# Altium PCB MPP.PcbDoc
Units mil, origin at the board's own origin, x right, y up, seen from the top; angles counter-clockwise.
Board outline 1830 x 1835 mil, 2 copper layers (Top Layer, Bottom Layer); 31 components, 16 nets, 79 pads, 22 vias.
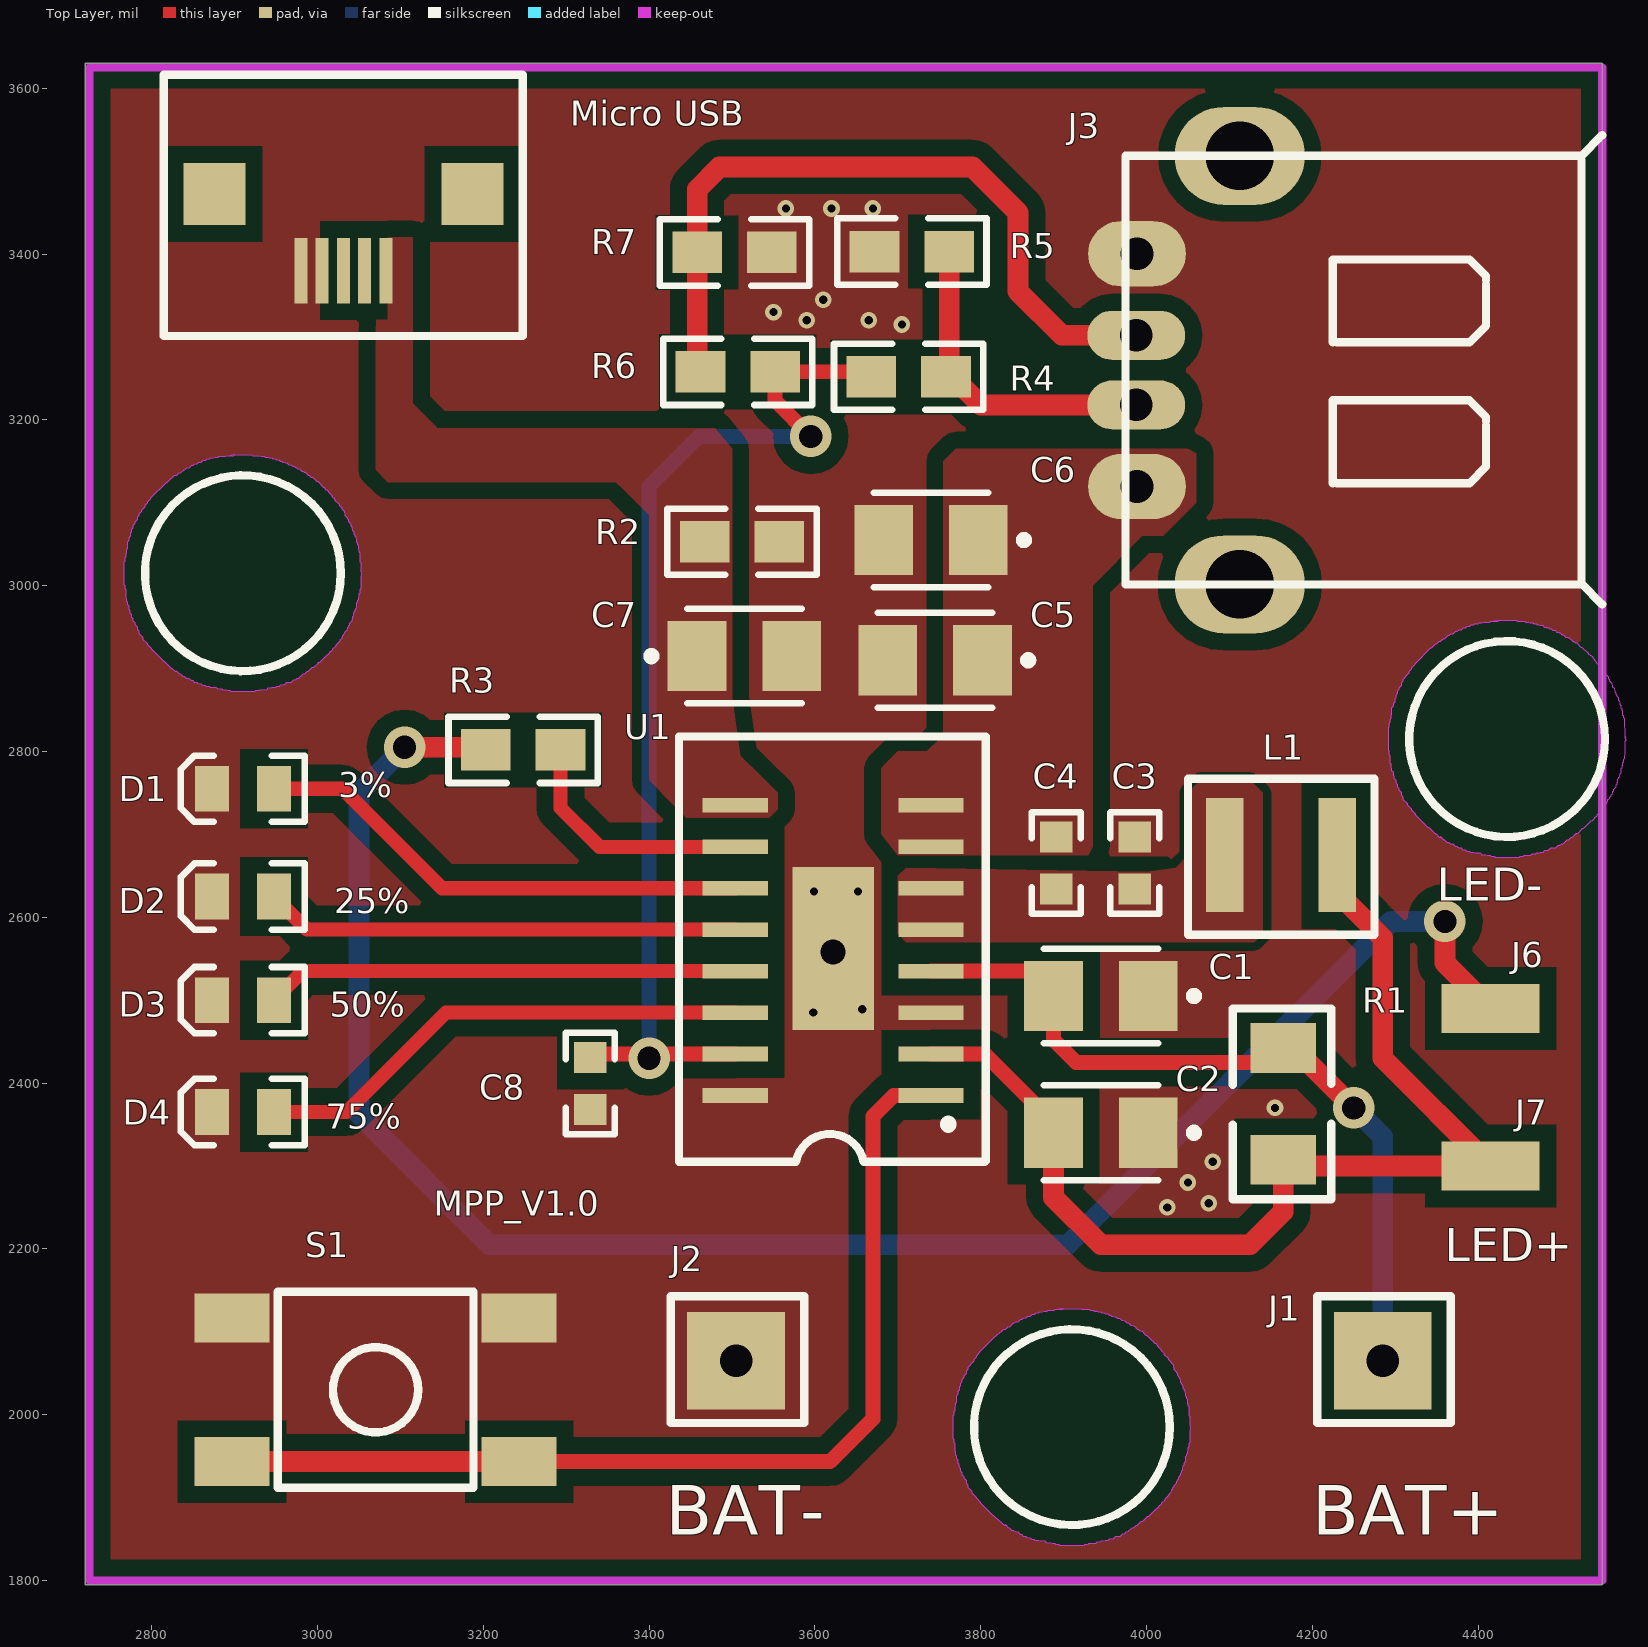
[diagram p0: Top Layer view]
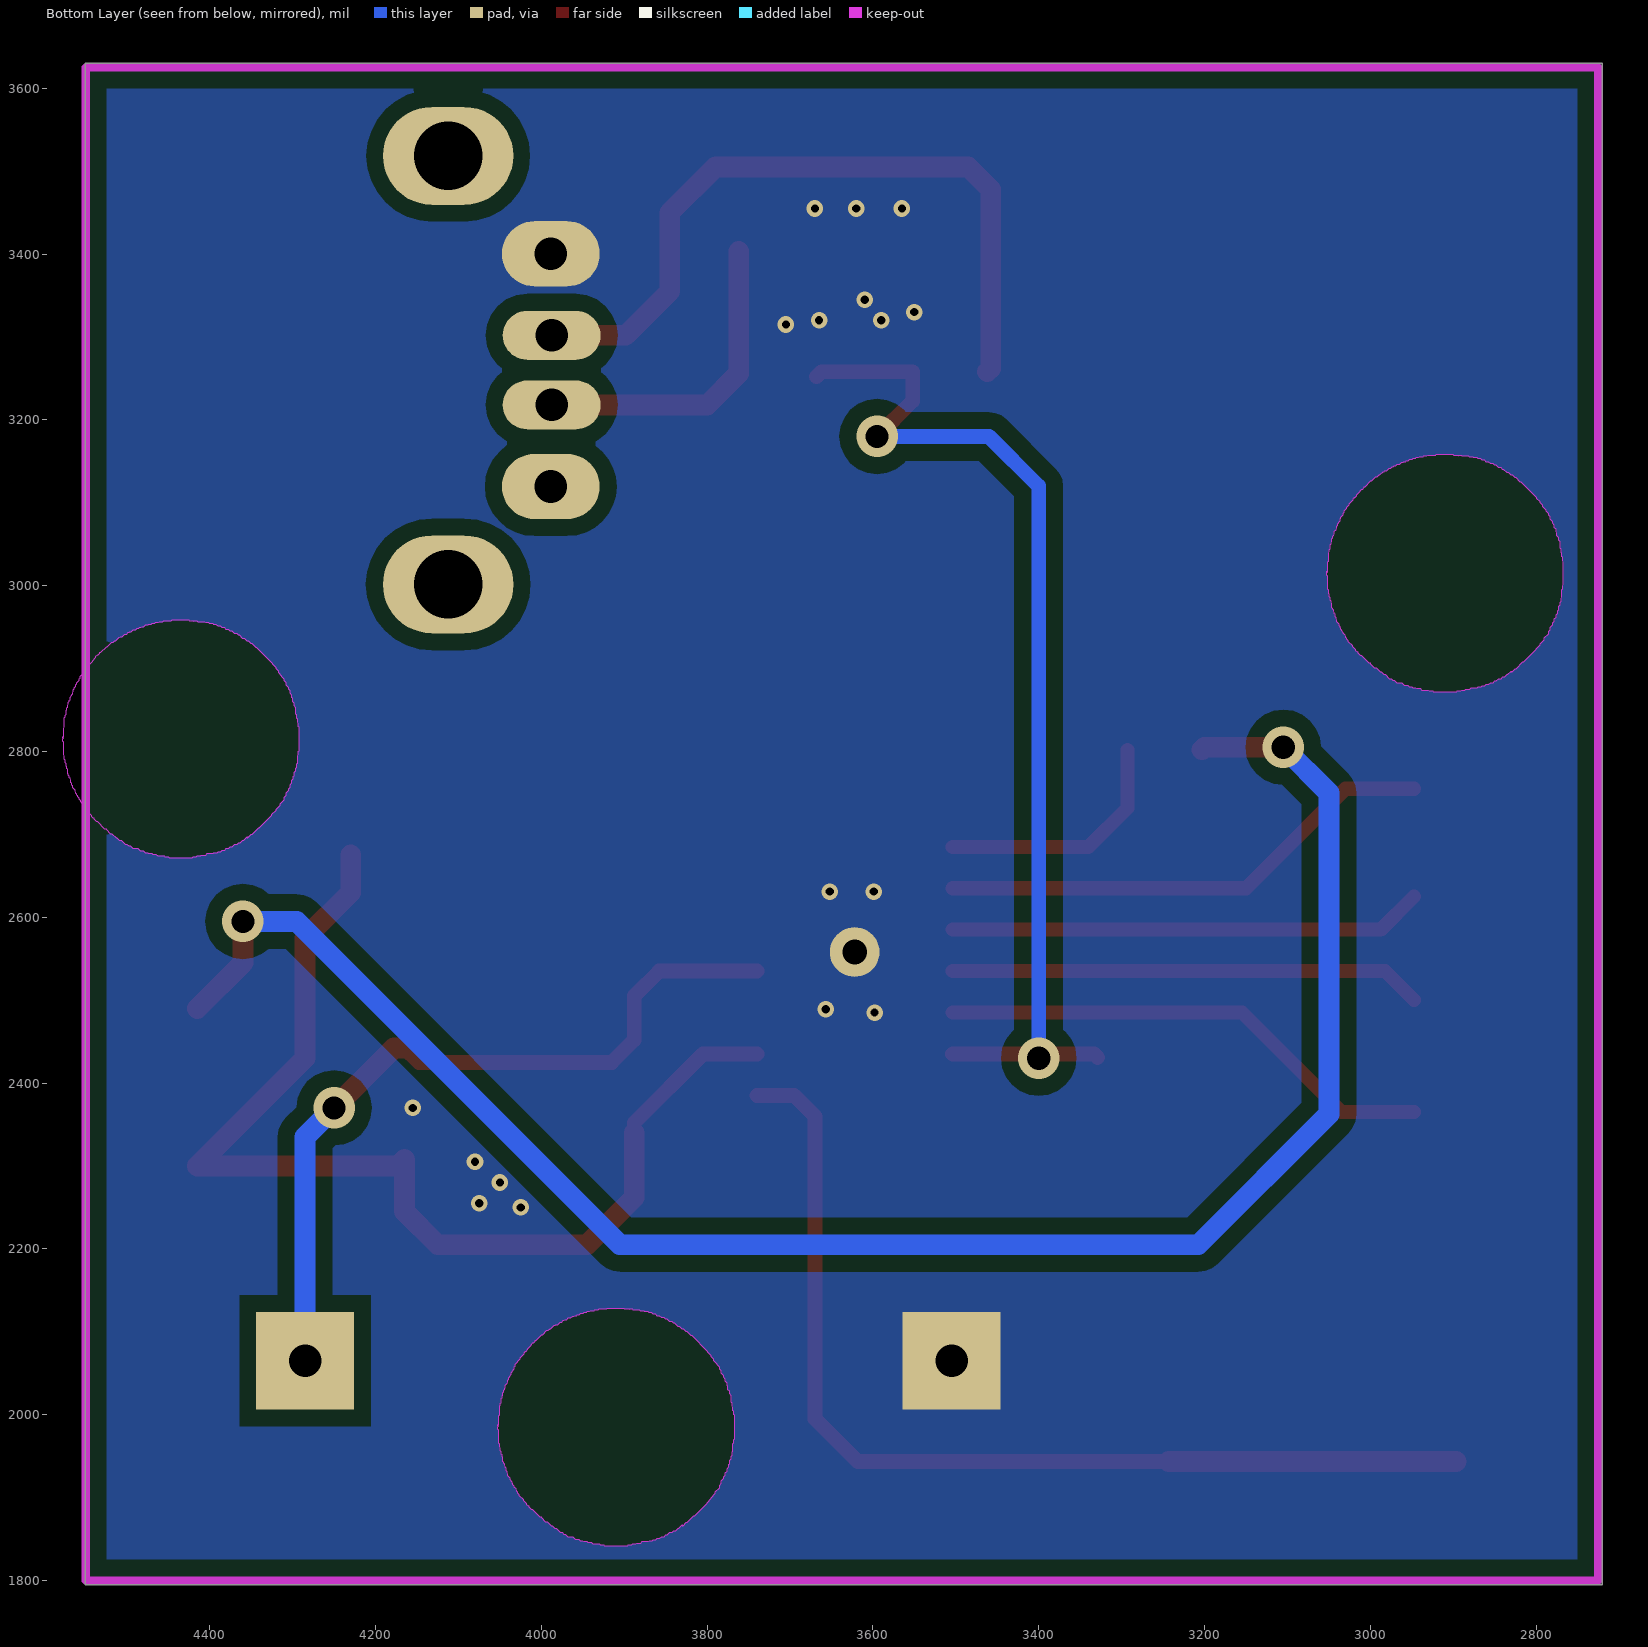
[diagram p1: Bottom Layer view, seen from below]
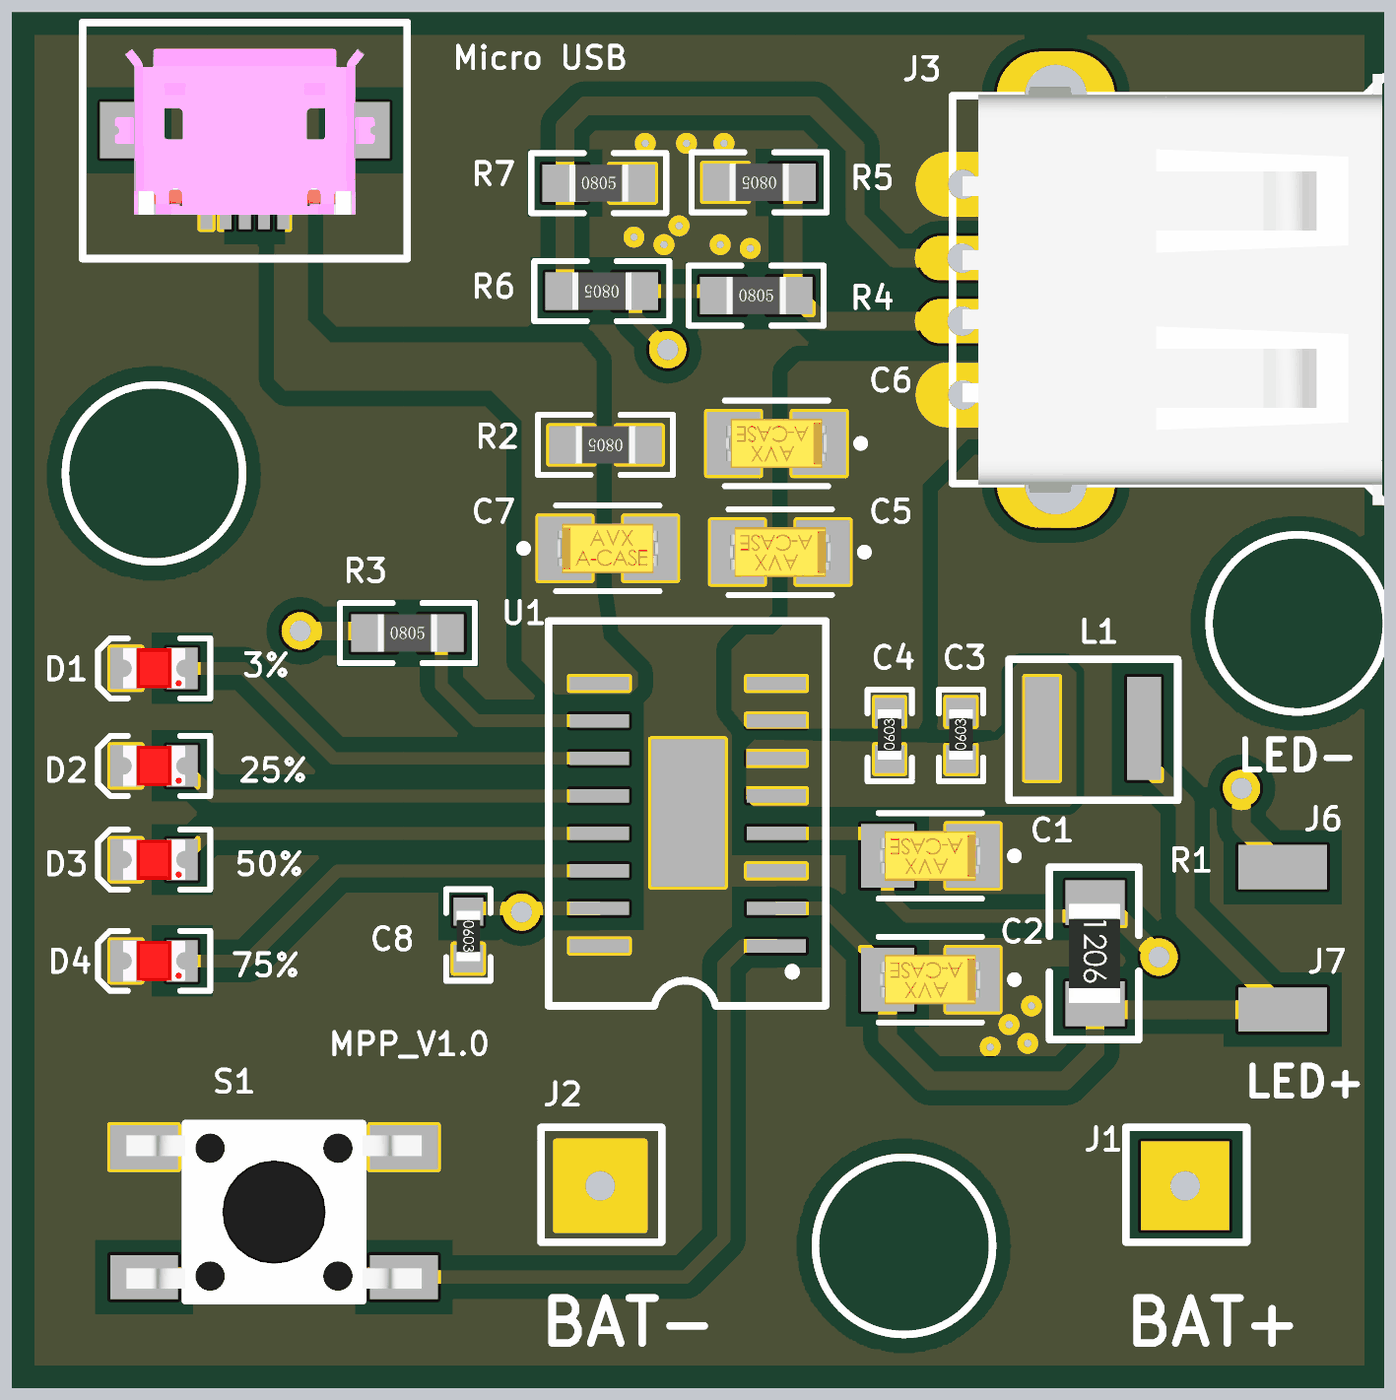
[diagram p2: 3D render of the assembled board from above, using the file's embedded part models]

## Layer stack, top to bottom
Top Solder: solder mask 0.4, Solder Resist, Dk 3.5
Top Layer: signal copper 1.4
Dielectric 1: dielectric 12.6, FR-4, Dk 4.8
Bottom Layer: signal copper 1.4
Bottom Solder: solder mask 0.4, Solder Resist, Dk 3.5

## Board outline
4550,1795 4550,3630 2720,3630 2720,1795

## Design rules (kind name [scope] priority, off if disabled: settings)
Clearance VIN [InNamedPolygon('VIN')] p1: gap=20
Clearance C3_C4 [InNamedPolygon('C3_C4')] p2: gap=10
Clearance VOUT_RULES [InNamedPolygon('VOUT')] p3: gap=20
Clearance [All] p4: gap=8
PolygonConnect [All] p1: connectstyle=Direct reliefconductorwidth=10 reliefentries=4 polygonreliefangle="90 Angle" airgapwidth=10
RoutingVias [All] p1: holewidth=28 width=50 viastyle="Through Hole" minholewidth=28 minwidth=50 maxholewidth=28 maxwidth=50
SolderMaskExpansion [All] p1: expansion=4
Width [All] p1: maxlimit=50 minlimit=10 preferedwidth=10
30 further rules are at their usual default settings.

## Classes and differential pairs
component class temp: C1 C2 C3 C4 C5 C6 C7 C8 D1 D2 D3 D4 J1 J2 J3 J6 J7 L1 "Micro USB" R1 R2 R3 R4 R5 R6 R7 S1 U1

## Components (designator, comment, footprint, x,y, rotation, side; value= is the part's Value field where it differs from the comment)
C1 "10UF" CAPMP3528X210N 3945,2505 r180 top
C2 "10UF" CAPMP3528X210N 3945,2340 r180 top
C3 "102" 0603_CAP 3985,2665 r90 top
C4 "2.2N" 0603_CAP 3890,2665 r90 top
C5 "10UF" CAPMP3528X210N 3745,2910 r180 top
C6 "10UF" CAPMP3528X210N 3740,3055 r180 top
C7 "10UF" CAPMP3528X210N 3515,2915 r0 top
C8 "2.2UF" 0603_CAP 3330,2400 r270 top
D1 "LED2" LED_0805 2945,2755 r180 top
D2 "LED2" LED_0805 2945,2625 r180 top
D3 "LED2" LED_0805 2945,2500 r180 top
D4 "LED2" LED_0805 2945,2365 r180 top
J1 "CON1" BAT 4285,2065 r0 top
J2 "CON1" BAT 3505,2065 r0 top
J3 "USB" USB4 4050,3260 r0 top
J6 "CON1" PIN 4415,2490 r270 top
J7 "CON1" PIN 4415,2300 r270 top
L1 "1UH" 4030 4230,2675 r90 top
"Micro USB" "USB-M" "Micro USB" 2980,3380 r0 top (schematic designator USB_MINI)
R1 "0.01R 1%" 1206_RES 4165,2375 r270 top
R2 "1K" 0805_Res 3515,3055 r180 top
R3 "1K" 0805_Res 3245,2800 r0 top
R4 "160K" 0805_Res 3710,3250 r0 top
R5 "300K" 0805_Res 3720,3405 r180 top
R6 "43K" 0805_Res 3510,3260 r180 top
R7 "300K" 0805_Res 3500,3400 r0 top
S1 "SW DIP-2" "BUTTON 6 * 6" 3070,2030 r0 top
U1 "FM3209F" "ESOP - 16" 3740,2385 r90 top
? "Comment" "Hole 3mm" 2910,3015 r0 top
? "Comment" "Hole 3mm" 3910,1985 r0 top
? "Comment" "Hole 3mm" 4435,2815 r0 top

## Footprints (in the part's own frame and the unit in brackets; to place one, negate y for a bottom-side part, rotate by r counter-clockwise, add the part's x,y. Pads: shape width x height; smd on the part's side, far side on the other; paste and mask are expansions set on the pad)
0603_CAP [mm]
  rect 0.95x1 smd: 1(-0.787,-0.025) 2(0.813,-0.025)
  silkscreen extent -1.54,-0.78 1.56,0.72, body extent -0.8,-0.43 0.9,0.37, height 0.56
0805_Res [mil] "0805"
  rect 60x50 smd: 1(-42,2) 2(48,2)
  silkscreen extent -87,-38 93,42, body extent -36,-23 42,27, height 22
1206_RES [mm]
  rect 1.52x2 smd: 1(-1.71,0) 2(1.71,0)
  silkscreen extent -2.92,-1.55 2.92,1.47, body extent -1.68,-0.89 1.68,0.84, height 0.85
4030 [mm]
  rect 3.5x1.15 smd: 1(0,0) 2(0,3.45)
  silkscreen extent -2.44,-1.14 2.34,4.57
BAT [mm]
  rect 3x3 hole 1: 1(0,0)
  silkscreen extent -2.01,-1.91 2.08,1.98
"BUTTON 6 * 6" [mm]
  rect 2.3x1.5 smd: 1(-4.4,2.2) 2(4.4,2.2) 3(-4.4,-2.2) 4(4.4,-2.2)
  silkscreen extent -3,-3 3,3, body extent -5,-3 5,3, height 5.1
CAPMP3528X210N [mm]
  rect 1.8x2.15 smd: 1(-1.45,0) 2(1.45,0)
  silkscreen extent -2.98,-1.45 1.75,1.45, body extent -1.7,-0.84 1.7,0.84, height 1.71
"ESOP - 16" [mm]
  rect 0.45x2 smd: 1(0,0) 2(1.27,0) 3(2.54,0) 4(3.81,0) 5(5.08,0) 6(6.35,0) 7(7.62,0) 8(8.89,0) 9(8.89,6) 10(7.62,6) 11(6.35,6) 12(5.08,6) 13(3.81,6) 14(2.54,6) 15(1.27,6) 16(0,6)
  round 1.524 hole 0.762: 17(4.394,2.997)
  rect 5x2.5 smd: 17(4.5,3)
  silkscreen extent -2.03,-1.68 11,7.72
"Hole 3mm" [mil] "hole 3mm"
  Keep-Out Layer pour cut-out: 299 vertices and 0 holes, not listed, extent -143,-143 143,143
  silkscreen extent -118,-118 118,118
LED_0805 [mm]
  rect 1.05x1.4 smd: 1(-0.061,0) 2(1.839,0)
  silkscreen extent -1.01,-1.02 2.79,1.02, body extent -0.16,-0.67 1.94,0.68, height 0.8
"Micro USB" [mm]
  rect 1.9x1.9 smd: 0(-2.65,2.35) 0(5.25,2.35)
  rect 0.4x2 smd: 1(0,0) 2(0.65,0) 3(1.3,0) 4(1.95,0) 5(2.6,0)
  silkscreen extent -4.2,-2 6.8,6, body extent -3.1,-0.52 5.7,5.11, height 2.74
PIN [mm]
  rect 1.5x3 smd: 1(0,0)
USB4 [mm]
  oval 3x2 hole 1: 1(-1.559,3.566) 4(-1.559,-3.566)
  oval 3x1.5 hole 1: 2(-1.585,1.066) 3(-1.585,-1.066)
  oval 4x3 hole 2.1: USB1(1.585,6.566) USB2(1.585,-6.566)
  silkscreen extent -1.92,-7.18 12.69,7.2, body extent -1.59,-7.3 12.64,7.3, height 5.1

## Part data
C1 C2 C3 C4: library part Cap, "Capacitor"
C5 C6 C7 C8: library part "Cap Pol1", "Polarized Capacitor (Radial)"
D1 D2 D3 D4: "Typical RED, GREEN, YELLOW, AMBER GaAs LED"
L1: library part Inductor, "Inductor"
R1 R2 R3 R4 R5 R6 R7: library part Res2, "Resistor"
S1: "DIP Switch, 2 Position, SPST"

## Via types
v1: diameter 20, hole 10, Top Layer to Bottom Layer, 17 vias
v2: diameter 50, hole 28, Top Layer to Bottom Layer, 5 vias

## Nets (pads, with @x,y where several pads share a name; then routed paths per layer and width w, separated by ;. In a path a pad name is that pad's centre, name@x,y a point inside that pad or via, vN(x,y) a via of type N, cw(c..) or ccw(c..) an arc to the next point about the centre after c; other vN are vias at no path point)
B+: C1.2 J1.1 R1.1 U1.4 | length 943.2
  Top Layer w18: U1.4 3857.91,2535 C1.2 3887.91,2452.09 3915,2425 4147.68,2425 R1.1
  Top Layer w25: R1.1 4177.68,2442.32 v2(4250,2370)
  Bottom Layer w25: v2(4250,2370) 4285,2335 J1.1
CHGS: C2.2 J7.1 L1.1 R1.2 U1.2 | length 1357
  Top Layer w18: U1.2 3805,2435 3887.91,2352.09 C2.2
  Top Layer w25: C2.2 3887.91,2262.09 3945,2205 4125,2205 4165,2245 R1.2 4172.68,2300 J7.1 4285,2430 4285,2575 4230,2630 L1.1
D+: J3.2 R6.2 R7.1 | length 902.2
  Top Layer w25: R6.2 3458,3262 R7.1 3458,3478 3485,3505 3790,3505 3845,3450 3845,3355 3898.04,3301.96 J3.2
D-: J3.3 R4.2 R5.1 | length 388.3
  Top Layer w25: R5.1 3762,3256 3799.96,3218.04 J3.3
GND: "Micro USB.1" "Micro USB.2" C1.1 C2.1 C3.2 C5.2 C6.2 C7.2 C8.2 D1.2 D2.2 D3.2 D4.2 J2.1 J3.1 R2.1 R5.2 R7.2 S1.1 S1.2 U1.3 U1.16 U1.17
  other v1: 4025,2250 4075,2255 4050,2280 4080,2305 4155,2370 3598,2485 3657,2489 3599,2631 3652,2631 3705,3315 3590,3320 3665,3320 3550,3330 3610,3345 3565,3455 3620,3455 3670,3455
KEY: S1.3 S1.4 U1.1 | length 1240
  Top Layer w18: S1.4 3618.39,1943.39 3670,1995 3670,2360 3695,2385 U1.1
  Top Layer w25: S1.3 S1.4
NetC3_1: C3.1 C4.1 L1.2 U1.5 U1.6
NetD1_1: D1.1 U1.11 | length 606.1
  Top Layer w17: D1.1 3030,2755 3150,2635 U1.11
NetD2_1: D2.1 U1.12 | length 572.9
  Top Layer w17: D2.1 2987.4,2585 U1.12
NetD3_1: D3.1 U1.13 | length 570.9
  Top Layer w17: D3.1 2982.4,2535 U1.13
NetD4_1: D4.1 U1.14 | length 606.1
  Top Layer w17: D4.1 3035,2365 3155,2485 U1.14
NetJ6_1: J6.1 R3.1 | length 2229.1
  Top Layer w25: v2(3105,2805) 3200,2805 R3.1 ; v2(4360,2595) 4360,2545 J6.1
  Bottom Layer w25: v2(3105,2805) 3050,2750 3050,2362.5 3207.5,2205 3905,2205 4295,2595 v2(4360,2595)
NetR3_2: R3.2 U1.10 | length 300.2
  Top Layer w17: R3.2 3293,2732 3340,2685 U1.10
VCC: C8.1 R4.1 R6.1 U1.15 | length 1307.7
  Top Layer w18: C8.1 3333.01,2435 v2@3405,2435 ; v2(3400,2430) v2@3405,2435 ; U1.15 v2@3405,2435 ; v2(3595,3180) 3552,3223 R6.1 3662,3258 R4.1
  Bottom Layer w18: v2(3400,2430) 3400,3120 3460,3180 v2(3595,3180)
VIN: "Micro USB.5" C7.1 R2.2 U1.9
VOUT: C4.2 C5.1 C6.1 J3.4 U1.7 U1.8
pads on no net: "Micro USB.0" "Micro USB.3" "Micro USB.4" J3.USB1 J3.USB2

## Polygon pours and split planes (outlines as drawn)
VOUT on Top Layer "VOUT" (solid, remove dead copper, pour order 0): 3700,2675 3760,2675 3815,2675 3930,2675 3935,2685 3935,2690 3935,3000 3995,3060 4010,3060 4020,3060 4060,3100 4060,3160 4050,3165 4025,3165 3905,3165 3840,3165 3770,3165 3755,3150 3755,3085 3755,2820 3750,2815 3735,2800 3700,2800 3685,2785 3680,2780 3680,2705 3680,2700
NetC3_1 on Top Layer "C3_C4" (solid, remove dead copper, pour order 4): 3700,2570 3785,2570 4130,2570 4140,2580 4140,2675 4140,2750 4125,2765 4095,2765 4065,2765 4050,2750 4050,2725 4050,2675 4035,2660 4000,2655 3710,2660 3700,2650 3700,2585 3700,2580 3710,2570
VIN on Top Layer "VIN" (solid, remove dead copper, pour order 6): 3555,2730 3545,2720 3540,2720 3445,2720 3430,2735 3400,2765 3400,2795 3400,3085 3370,3115 3360,3125 3160,3125 3085,3125 3070,3140 3070,3215 3070,3305 3075,3420 3080,3420 3085,3420 3090,3420 3115,3420 3115,3305 3115,3290 3115,3220 3145,3190 3300,3190 3480,3190 3500,3165 3500,3160 3500,3105 3500,3050 3500,2995 3500,2940 3500,2865 3510,2795 3535,2770 3555,2750
GND on Top Layer "GND" (solid, remove dead copper, pour order 8): 2730,1800 4675,1800 4675,3625 2725,3625
GND on Bottom Layer "GND_BOT" (solid, remove dead copper, pour order 10): 2725,1800 4675,1800 4675,3625 2725,3625

## Keep-outs
Keep-Out Layer:
  lines w10: 2725,1800 2725,3625 4549.6,3625 4549.6,1800 2800,1800 2725,1800

## Silkscreen, mask and mechanical layers (free items; w line width, h text height)
Top Overlay:
  text "3%" at 3025,2745 h30
  text "LED-" at 4350,2620 h40
  text "25%" at 3020,2605 h30
  text "50%" at 3015,2480 h30
  text "75%" at 3010,2345 h30
  text "MPP_V1.0" at 3140,2240 h30
  text "LED+" at 4360,2185 h40
  text "BAT-" at 3420,1855 h60
  text "BAT+" at 4200,1855 h60

## Dimensions
2725,1800 to 4549.6,1800 on Keep-Out Layer
2725,1800 to 2725,3625 on Keep-Out Layer

## Text inside footprints (layer, text, board x,y; h text height)
C1: Mechanical 15 "1" at 3927.29,2511.47 h29.53 r270
C2: Mechanical 15 "1" at 3927.29,2346.47 h29.53 r270
C5: Mechanical 15 "1" at 3727.29,2916.47 h29.53 r270
C6: Mechanical 15 "1" at 3722.29,3061.47 h29.53 r270
C7: Mechanical 15 "1" at 3532.71,2908.53 h29.53 r90